# Altium PCB EP3C25.PcbDoc (part 4 of 4)
Units mil, origin at the board's own origin, x right, y up, seen from the top; angles counter-clockwise.
Board outline 6000 x 4000 mil, 2 copper layers (Top Layer, Bottom Layer); 113 components, 182 nets, 855 pads, 215 vias.
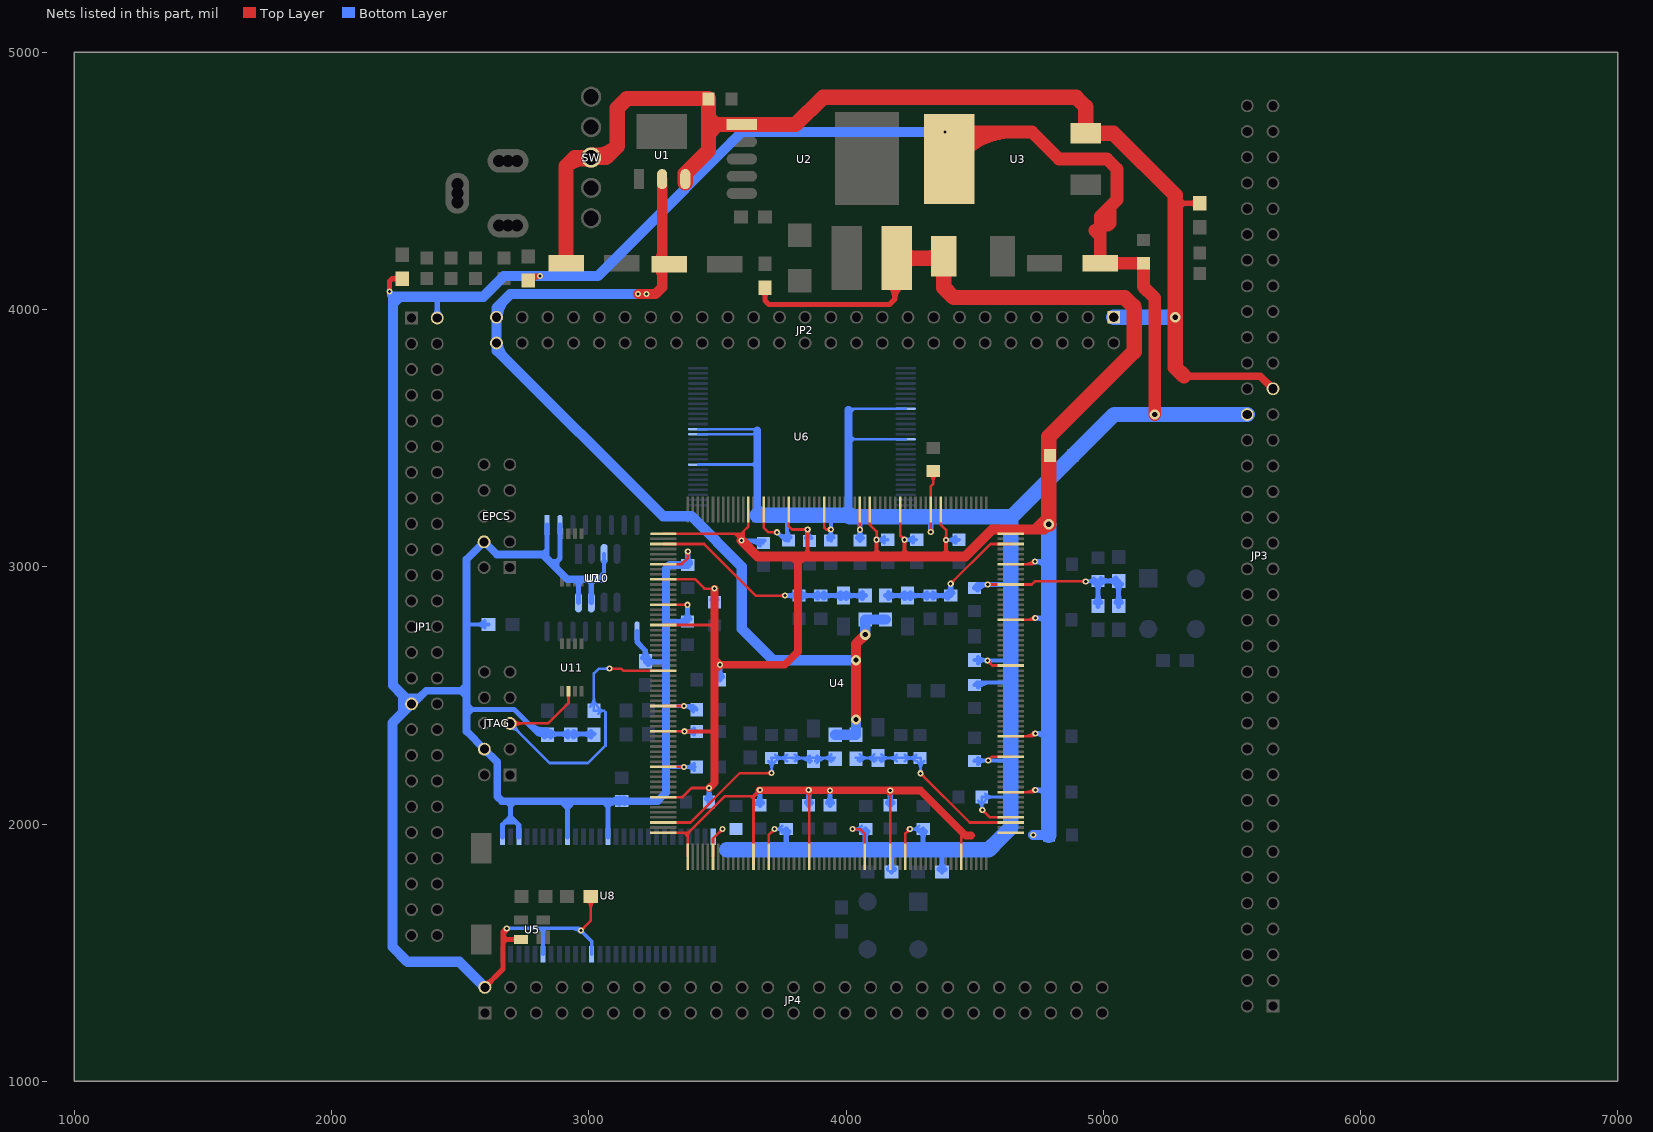
[diagram p4: the nets of this part, all layers, seen from the top]

## Via types
v1: diameter 24, hole 12, Top Layer to Bottom Layer, 205 vias
v2: diameter 40, hole 20, Top Layer to Bottom Layer, 6 vias
v3: diameter 250, hole 130, Top Layer to Bottom Layer, 3 vias
v4: diameter 250, hole 150, Top Layer to Bottom Layer, 1 vias

## Nets (pads, with @x,y where several pads share a name; then routed paths per layer and width w, separated by ;. In a path a pad name is that pad's centre, name@x,y a point inside that pad or via, vN(x,y) a via of type N, cw(c..) or ccw(c..) an arc to the next point about the centre after c; other vN are vias at no path point) (continued)
TMS: JTAG.5 R18.1 U4.28 U11.2 | length 1708.9
  Top Layer w10: JTAG.5@2694,2391 2841,2391 2921.2,2471.2 U11.2@2921.2,2516.49 ; JTAG.5@2708.14,2376.86 cw(c2742.28,2342.72) 2742.28,2391 cw(c2742.28,2439.28) JTAG.5@2708.14,2405.14 ; v1(3080,2604) 3126,2604 3133.49,2596.51 U4.28@3290,2596.51 ; v1@3084.95,2599.05 cw(c3096.9,2587.1) 3096.9,2604 cw(c3096.9,2620.9) v1@3084.95,2608.95
  Bottom Layer w10: JTAG.5@2694,2371 cw(c2694,2322.72) 2728.14,2356.86 cw(c2762.28,2391) JTAG.5@2714,2391 ; JTAG.5@2694,2391 2848,2237 2997,2237 3065,2305 3065,2435 3060,2440 ; R18.1@3005.44,2456.53 ccw(c2970.29,2491.68) 3020,2491.68 ccw(c3069.71,2491.68) R18.1@3034.56,2456.53 ; R18.1@3036.76,2428.04 cw(c3060,2411.45) 3060,2440 ; R18.1@3036.76,2451.96 ccw(c3060,2468.55) 3060,2440 ; v1@3075.05,2599.05 ccw(c3063.1,2587.1) 3063.1,2604 ccw(c3063.1,2620.9) v1@3075.05,2608.95 ; v1(3080,2604) 3039,2604 3020,2585 R18.1@3020,2440 3060,2440
VCC_1.2: C5.1 C7.2 C8.2 C10.2 C12.2 C14.2 C15.2 C17.2 C18.2 C27.2 C28.2 C33.2 C34.2 C37.2 C44.2 C48.2 C50.2 C51.2 C53.2 C55.2 L1.2 R5.1 U4.1 U4.10 U4.19 U4.40 U4.53 U4.60 U4.61 U4.74 U4.85 U4.101 U4.115 U4.121 U4.129 U4.140 U4.163 U4.174 U4.180 U4.190 U4.198 U4.204 U4.220 U4.228 | length 15659.4
  Top Layer w10: U4.60@3290,1966.59 3370,1966.59 ; U4.53@3290,2104.38 3364.38,2104.38 3400,2140 v1(3468,2140) ; U4.40@3290,2360.29 3488,2360.29 ; U4.19@3290,2773.67 3467,2773.67 ; U4.10@3290,2950.84 3414.16,2950.84 3450,2915 v1(3489,2915) ; U4.1@3291,3128 3564,3128 ; v1@3367.05,2355.34 ccw(c3355.1,2343.39) 3355.1,2360.29 ccw(c3355.1,2377.19) v1@3367.05,2365.24 ; v1@3376.95,2355.34 cw(c3388.9,2343.39) 3388.9,2360.29 cw(c3388.9,2377.19) v1@3376.95,2365.24 ; U4.61@3384.49,1872.1 3384.49,1963.49 ; 3384.49,1952 3384.49,1952.1 3370,1966.59 ; 3409.5,1988.5 3387.59,1966.59 3381.39,1966.59 ; v1@3463.05,2135.05 ccw(c3451.1,2123.1) 3451.1,2140 ccw(c3451.1,2156.9) v1@3463.05,2144.95 ; v1@3484.05,2910.05 ccw(c3472.1,2898.1) 3472.1,2915 ccw(c3472.1,2931.9) v1@3484.05,2919.95 ; 3488.17,2773.67 3467,2773.67 ; 3489,2756 3471.33,2773.67 3467,2773.67 ; 3489,2791 3471.67,2773.67 3467,2773.67 ; v1@3587,3102 ccw(c3570.1,3102) 3582.05,3113.95 ccw(c3594,3125.9) v1@3594,3109 ; 3592,3114.07 cw(c3581.93,3114.07) 3589.05,3106.95 ccw(c3558.3,3138) 3602,3138 ; 3592,3123.73 ccw(c3615.73,3123.73) v1@3598.95,3106.95 ; 3592.05,3113.95 cw(c3580.1,3102) v1@3597,3102 ; v1@3596.11,3099.87 ccw(c3582.1,3114) 3602,3114 ; U4.228@3620.71,3222.49 3620.71,3156.71 3602,3138 ; U4.74@3640.39,1872.1 3640.39,2107.39 ; 3640.39,2095 3640.39,2097 3630,2107.39 ; v1@3658,2132 cw(c3641.1,2132) 3653.05,2120.05 cw(c3665,2108.1) v1@3665,2125 ; v1@3664,2131 3640.39,2107.39 ; U4.220@3778.19,3222.49 3778.19,3156.81 3790,3145 v1(3851,3145) ; 3832,2131 3837.93,2131 3856.93,2112 ; v1@3846.05,3140.05 ccw(c3834.1,3128.1) 3834.1,3145 ccw(c3834.1,3161.9) v1@3846.05,3149.95 ; v1@3850.05,2127.05 cw(c3833.45,2110.45) 3856.93,2110.45 ; U4.85@3856.93,1872.1 3856.93,2112 ; 3856.93,2119.76 cw(c3867.24,2119.76) v1@3859.95,2127.05 ; v1@3856.93,2130 3856.93,2112 ; 3876,2131 3875.93,2131 3856.93,2112 ; U4.204@4093.15,3222.49 4093.15,3162.85 4119,3137 v1(4119,3105) ; v1@4114.05,3109.95 ccw(c4102.1,3121.9) 4119,3121.9 ccw(c4135.9,3121.9) v1@4123.95,3109.95 ; 4152,2131 4171.89,2111.11 4171.89,2111 ; v1@4166.94,2125.05 cw(c4154.99,2113.1) 4171.89,2113.1 cw(c4188.79,2113.1) v1@4176.84,2125.05 ; U4.101@4171.89,1872.1 4171.89,2111 ; v1(4171.89,2130) 4171.89,2111 ; 4192,2130 4190.89,2130 4171.89,2111 ; U4.198@4211.26,3222.49 4211.26,3120.74 v1(4227,3105) ; v1@4220,3105 ccw(c4203.1,3105) 4215.05,3116.95 ccw(c4227,3128.9) v1@4227,3112 ; 4363,3040 4364,3040 4389,3065 ; 4368.74,3165.61 U4.190@4368.74,3222.49 4368.74,3163.26 4389,3143 4389,3065 ; v1@4384.05,3099.05 cw(c4372.1,3087.1) 4389,3087.1 cw(c4405.9,3087.1) v1@4393.95,3099.05 ; v1@4384.05,3108.95 ccw(c4372.1,3120.9) 4389,3120.9 ccw(c4405.9,3120.9) v1@4393.95,3108.95 ; 4389,3040 4389,3065 ; U4.115@4447.48,1872.1 4447.48,1966 ; U4.129@4640.39,2124.07 4728.07,2124.07 v1(4736,2132) ; U4.140@4640.39,2340.6 4724.6,2340.6 v1(4736,2352) ; U4.163@4640.39,2793.36 4728.36,2793.36 v1(4736,2801) ; U4.174@4640.39,3009.89 4724.89,3009.89 v1(4735,3020) ; 4691.58,2340.6 ccw(c4691.58,2396.42) v1@4731.05,2356.95 ; 4693.69,3009.89 ccw(c4693.69,3061.31) v1@4730.05,3024.95 ; 4699.95,2124.07 ccw(c4699.95,2168.05) v1@4731.05,2136.95 ; 4700.65,2793.36 ccw(c4700.65,2836.35) v1@4731.05,2805.95 ; 4715.72,2340.6 ccw(c4715.72,2372.28) v1@4738.12,2349.88 ; 4717.83,3009.89 ccw(c4717.83,3037.17) v1@4737.12,3017.88 ; 4724.09,2124.07 ccw(c4724.09,2143.91) v1@4738.12,2129.88 ; 4724.79,2793.36 ccw(c4724.79,2812.21) v1@4738.12,2798.88 ; 3370,1966.59 3381.39,1966.59 ; 3381.39,1966.59 3384.49,1963.49 ; 3384.49,1963.49 3528.39,2107.39 3630,2107.39 ; 3564,3128 3578,3128 ; 3564,3128 3568,3128 v1(3594,3102) ; 3578,3128 3592,3128 ; 3578,3128 3592,3114 v1@3592,3104 ; v1@3592,3104 3592,3128 ; v1@3592,3104 v1(3594,3102) ; 3592,3128 3602,3138 ; v1(3594,3102) 3602,3110 3602,3138 ; 3630,2107.39 3640.39,2107.39
  Top Layer w15: v1(3372,2360.29) 3488.29,2360.29 3489,2361 ; 3640.39,2107.39 v1@3664,2131 ; 3829,3040 3851,3062 ; 3848,3040 3851,3043 3851,3065 ; v1(3851,3145) 3851,3065 ; 3875,3040 3873,3040 3851,3062 ; 4097,3040 4119,3062 4119,3065 ; v1(4119,3105) 4119,3065 ; 4122,3040 4119,3043 4119,3065 ; 4142,3040 4119,3063 4119,3065 ; 4205,3040 4227,3062 4227,3067 ; 4222,3040 4227,3045 4227,3067 ; v1(4227,3105) 4227,3067 ; 4250,3040 4227,3063 4227,3067 ; 4389,3040 4389,3065 ; v1(4389,3104) 4389,3065 ; 4411,3040 4389,3062 4389,3065 ; 3851,3062 3851,3065
  Top Layer w20: 3489,2576 3489,2598 v1(3510,2619) 3489,2640 3489,2656 ; R5.1@3673.98,4072.01 cw(c3647.36,4045.39) 3685,4045.39 cw(c3722.64,4045.39) R5.1@3696.02,4072.01 ; R5.1@3685,4085 3685,4035 3700,4020 4169,4020 4190,4041 L1.2@4190,4130 ; L1.2@4164.39,4098.84 cw(c4111.2,4040.71) 4190,4040.71 cw(c4247.9,4040.71) L1.2@4220.62,4091.77 ; 4190,4074.07 cw(c4230.07,4074.07) L1.2@4211.19,4109.41
  Top Layer w30: v1(3468,2140) 3489,2161 v1(3489,2915) ; 3489,2598 v1(3510,2619) ; 3489,2656 3489,2640 v1(3510,2619) ; v1@3664,2131 4170.89,2131 v1(4171.89,2130) 4290,2130 4465,1955 4486,1955 ; 3790,3040 3813,3017 3813,3008 ; 3813,3040 3813,3008 ; 3837,3040 3813,3016 3813,3008 ; v1(3510,2619) 3762,2619 3813,2670 3813,3008
  Top Layer w40: v1(3594,3102) 3656,3040 4464,3040 4569,3145 4734,3145 ; 4739.72,3145 ccw(c4739.72,3213.28) v2(4788,3165) ; 4771,3145 4734,3145 ; 4788,3206 4788,3199 4734,3145
  Top Layer w60: L1.2@4197.5,4200 C5.1@4360,4200 ; L1.2@4218.05,4179.45 cw(c4267.65,4129.85) 4267.65,4200 cw(c4267.65,4270.15) L1.2@4218.05,4220.55 ; 4316.72,4200 ccw(c4316.72,4270.28) C5.1@4366.41,4220.59 ; C5.1@4380,4207 4380,4085 4418.25,4046.75 5083.25,4046.75 5118,4012 5118,4005.41 5120,4003.41 5120,3836.59 4788,3504.59 v2(4788,3165)
  Bottom Layer w10: C48.2@3650,2075 C48.2@3665,2075
  Bottom Layer w15: v1(3372,2360.29) 3419.71,2360.29 C33.2@3420,2360 ; v1@3380.39,2360.29 cw(c3380.39,2320.39) C33.2@3408.6,2348.6 ; v1@3381.77,2360.29 ccw(c3381.77,2398.23) C33.2@3408.6,2371.4 ; v1(3594,3102) C8.2@3684,3102 ; 3616.38,3102 cw(c3616.38,3032.35) C8.2@3665.63,3081.6 ; 3652.59,3102 cw(c3652.59,3068.56) C8.2@3676.24,3092.21 ; C10.2@3844.63,3111.4 ccw(c3829.26,3126.77) 3851,3126.77 ; C10.2@3851,3100 v1(3851,3145) ccw(c3893.31,3145) C10.2@3866.32,3112.41 ; v1(4119,3105) C12.2@4162,3105 ; C12.2@4148.63,3093.6 ccw(c4121.11,3066.08) 4121.11,3105 ccw(c4121.11,3143.92) C12.2@4148.63,3116.4 ; v1(4227,3105) C14.2@4273,3105 ; C14.2@4261.63,3093.6 ccw(c4234.11,3066.08) 4234.11,3105 ccw(c4234.11,3143.92) C14.2@4261.63,3116.4 ; v1(4389,3104) 4438,3104 C15.2@4439,3105 ; v1@4395.7,3104 ccw(c4395.7,3146.34) C15.2@4425.63,3116.4 ; v1@4400.52,3104 cw(c4400.52,3068.49) C15.2@4425.63,3093.6
  Bottom Layer w20: C37.2@3458.37,2097.6 ccw(c3435.11,2120.85) 3468,2120.85 ccw(c3500.89,2120.85) C37.2@3477.63,2097.6 ; C37.2@3468,2086 v1(3468,2140) ; C18.2@3479.37,2871.63 ccw(c3456.11,2894.89) 3489,2894.89 ccw(c3521.89,2894.89) C18.2@3498.63,2871.63 ; C18.2@3489,2862 v1(3489,2915) ; C28.2@3500.37,2572.6 ccw(c3477.11,2595.85) 3510,2595.85 ccw(c3542.89,2595.85) C28.2@3519.63,2572.6 ; C28.2@3510,2561 v1(3510,2619) ; C48.2@3655.37,2082.8 ccw(c3632.11,2106.06) 3665,2106.06 ccw(c3697.89,2106.06) C48.2@3674.63,2082.8 ; C48.2@3665,2073.17 v1(3665,2132) ; C50.2@3846.34,2082.8 ccw(c3825.42,2103.72) 3855,2103.72 ; C50.2@3855,2073.17 v1(3855,2132) ; 3855,2108.4 ccw(c3891.19,2108.4) C50.2@3865.6,2082.8 ; C51.2@3928.37,2082.8 ccw(c3905.11,2106.06) 3938,2106.06 ccw(c3970.89,2106.06) C51.2@3947.63,2082.8 ; C51.2@3938,2073.17 v1(3938,2130) ; C53.2@4162.37,2082.8 ccw(c4139.11,2106.06) 4172,2106.06 ccw(c4204.89,2106.06) C53.2@4181.63,2082.8 ; v1(4171.89,2130) 4172,2129.89 C53.2@4172,2073.17 ; v1(4735,3020) 4778,3020 C17.2@4788,3010 ; v1@4735.72,3020 cw(c4735.72,2959.69) C17.2@4778.37,3002.34 ; v1(4736,2132) 4778,2132 C44.2@4786,2124 ; v1(4736,2801) 4780,2801 C27.2@4787,2794 ; v1@4738.55,2132 cw(c4738.55,2078.52) C44.2@4776.37,2116.34 ; v1@4741.97,2801 cw(c4741.97,2750.93) C27.2@4777.37,2786.34 ; C34.2@4776.89,2333.84 ccw(c4736,2296.89) v1(4736,2352) 4776,2352 C34.2@4787,2341
  Bottom Layer w40: v1(4728,1957) C55.2@4789,1957
  Bottom Layer w60: C55.2@4788,1956 v2(4788,3165)
VCC_2.5: C4.1 JP2.49 JP2.50 L2.1 L3.1 L5.1 L6.1 U1.2 | length 4219
  Top Layer w40: v1(3192,4060) 3258,4060 3285.16,4087.16 U1.2@3285.16,4507 ; C4.1@3267.2,4167.87 cw(c3223.85,4124.52) 3285.16,4124.52 ; C4.1@3267.2,4184.13 ccw(c3223.85,4227.48) 3285.16,4227.48 ; v2(4039,2406) 4039,2700 v2(4075,2736)
  Bottom Layer w40: 2641,3839 JP2.50@2641,3870 ; JP2.50@2646,3870 ccw(c2720.84,3870) 2667.92,3817.08 ; JP2.49@2646,3970 cw(c2744.98,3970) 2674.99,4039.99 ; v1(3225,4060) 2695,4060 2641,4006 JP2.49@2641,3970 JP2.50@2641,3870 ; L5.1@3958,2347 L6.1@4039,2347 v2(4039,2406) ; v2(4039,2637) 3716.73,2637 3595,2758.73 3595,3000.66 3399.66,3196 3289,3196 2641,3844 JP2.50@2641,3870 ; v2(4075,2736) L2.1@4075,2795 L3.1@4154,2795
VCC_3.3: C2.2 C6.1 C9.2 C11.2 C13.2 C16.2 C19.2 C20.2 C21.2 C22.2 C31.2 C32.2 C35.2 C36.2 C45.2 C46.2 C47.2 C49.2 C52.2 C54.2 EPCS.4 JP1.2 JP1.31 JP3.48 JP4.2 JTAG.4 L4.2 L7.2 R3.1 R4.1 R7.1 R9.1 R10.1 R11.2 R12.2 R13.2 R16.2 R17.2 R18.2 R22.1 U3.2 U4.7 U4.15 U4.35 U4.47 U4.66 U4.77 U4.96 U4.104 U4.124 U4.136 U4.154 U4.170 U4.192 U4.206 U4.213 U4.225 U5.4 U6.9 U6.15 U6.16 U6.37 U6.43 U7.1 U7.2 U7.9 U8.1 U8.3 U8.9 U8.14 U8.27 U8.43 U8.49 U10.3 U10.7 U10.8 | length 31198.5
  Top Layer w10: v1(2969.5,1585.5) 3008,1624 R7.1@3008,1718 ; v1@2969.5,1592.5 ccw(c2969.5,1609.4) 2981.45,1597.45 ccw(c2993.4,1585.5) v1@2976.5,1585.5 ; R7.1@2993.44,1703.44 cw(c2958.29,1668.29) 3008,1668.29 cw(c3057.71,1668.29) R7.1@3022.56,1703.44 ; U4.47@3290,2222.49 v1@3367.49,2222.49 ; U4.35@3290,2458.71 v1(3370,2458.71) ; U4.15@3290,2852.41 3383.85,2852.41 3384,2852.26 v1(3384,2852) ; U4.7@3290,3009.89 3360.89,3009.89 3385,3034 v1(3385,3059) ; 3351.92,2222.49 cw(c3351.92,2203.92) v1@3365.05,2217.05 ; 3354.28,2222.49 ccw(c3354.28,2237.72) v1@3365.05,2226.95 ; v1@3365.05,2453.76 ccw(c3353.1,2441.81) 3353.1,2458.71 ccw(c3353.1,2475.61) v1@3365.05,2463.66 ; 3366.11,2852.41 cw(c3366.11,2834.11) v1@3379.05,2847.05 ; 3368.09,2852.41 ccw(c3368.09,2867.91) v1@3379.05,2856.95 ; v1@3380.05,3054.05 cw(c3368.1,3042.1) 3385,3042.1 cw(c3401.9,3042.1) v1@3389.95,3054.05 ; U4.66@3482.91,1872.1 3482.91,1942.91 v1(3520,1980) ; v1@3513,1980 cw(c3496.1,1980) 3508.05,1968.05 cw(c3520,1956.1) v1@3520,1973 ; U4.225@3679.76,3222.49 3679.76,3152.24 3698,3134 v1(3732,3134) ; U4.77@3699.36,1872.19 3699.36,1934.36 3699.36,1957.36 v1(3722,1980) ; v1@3715,1980 cw(c3698.1,1980) 3710.05,1968.05 cw(c3722,1956.1) v1@3722,1973 ; v1@3727.05,3129.05 ccw(c3715.1,3117.1) 3715.1,3134 ccw(c3715.1,3150.9) v1@3727.05,3138.95 ; U4.213@3915.98,3222.49 3915.98,3152.02 3923,3145 v1(3941,3145) ; v1@3936.05,3140.05 ccw(c3924.1,3128.1) 3924.1,3145 ccw(c3924.1,3161.9) v1@3936.05,3149.95 ; v1(4025,1980) 4055,1980 4073.46,1961.54 U4.96@4073.46,1872.1 4073.46,1936.54 ; v1@4029.95,1975.05 cw(c4041.9,1963.1) 4041.9,1980 cw(c4041.9,1996.9) v1@4029.95,1984.95 ; v1@4049.05,3148.95 ccw(c4037.64,3160.36) 4053.78,3160.36 ; 4053.78,3161.44 ccw(c4071.44,3161.44) v1@4058.95,3148.95 ; U4.206@4053.78,3222.49 4053.78,3144.1 4053.88,3144 v1(4054,3144) ; U4.104@4230.94,1872.1 4230.94,1939.06 4230.94,1962.94 v1(4248,1980) ; v1@4241,1980 cw(c4224.1,1980) 4236.05,1968.05 cw(c4248,1956.1) v1@4248,1973 ; v1@4324.42,3140.58 ccw(c4312.47,3152.53) 4329.37,3152.53 ccw(c4346.27,3152.53) v1@4334.32,3140.58 ; C16.2@4325.83,3358.83 cw(c4294.04,3327.04) 4339,3327.04 cw(c4383.96,3327.04) C16.2@4352.17,3358.83 ; v1(4329.37,3135.63) U4.192@4329.37,3222.49 4329.37,3311.37 4339,3321 C16.2@4339,3372 ; v1@4530,2048 cw(c4530,2031.1) 4541.95,2043.05 cw(c4553.9,2055) v1@4537,2055 ; v1(4530,2055) 4559.36,2025.64 U4.124@4640.39,2025.64 ; v1@4550,2628 cw(c4550,2611.1) 4561.95,2623.05 cw(c4573.9,2635) v1@4557,2635 ; v1(4550,2635) 4568.81,2616.19 U4.154@4640.39,2616.19 ; v1(4551,2931) v1@4555,2927 ; v1@4551,2931.15 U4.170@4640.39,2931.15 4722.15,2931.15 4734,2943 v1(4932,2943) ; v1(4553,2247) 4567.86,2261.86 U4.136@4640.39,2261.86 ; v1@4553,2254 ccw(c4553,2270.9) 4564.95,2258.95 ccw(c4576.9,2247) v1@4560,2247 ; v1@4555.95,2926.05 cw(c4568.26,2913.74) 4568.26,2931.15 ; v1@4555.95,2935.95 ccw(c4567.54,2947.54) 4567.54,2931.15 ; v1@4927.05,2938.05 ccw(c4915.1,2926.1) 4915.1,2943 ccw(c4915.1,2959.9) v1@4927.05,2947.95
  Top Layer w20: v1(2225,4070) 2225,4110 2235,4120 R3.1@2275,4120 ; R3.1@2263.98,4108.98 ccw(c2237.36,4082.36) 2237.36,4120 ccw(c2237.36,4157.64) R3.1@2263.98,4131.02 ; JP4.2@2596,1365 2666.8,1435.8 2666.8,1579.8 v1(2681,1594) ; JP4.2@2596,1380 ccw(c2596,1416.21) 2621.61,1390.61 ccw(c2647.21,1365) JP4.2@2611,1365 ; 2666.8,1539 2679.4,1551.6 2682,1551.6 ; 2666.8,1551 2667.4,1551.6 2682,1551.6 ; 2666.8,1554.89 cw(c2720.11,1554.89) v1@2682.41,1592.59 ; 2666.8,1563 2678.2,1551.6 2682,1551.6 ; 2666.8,1573.92 cw(c2685.35,1573.92) v1@2681.42,1592.05 ; U5.4@2722.38,1546.14 ccw(c2709.2,1532.97) 2709.2,1551.6 ccw(c2709.2,1570.23) U5.4@2722.38,1557.05 ; U5.4@2736.69,1551.6 2682,1551.6 ; R4.1@2763,4107 2786,4130 v1(2810,4130) ccw(c2810,4097.22) R4.1@2779.5,4109.25
  Top Layer w40: JP4.2@2596,1365 JP4.2@2598.38,1365
  Top Layer w50: v1(4385,4690) 4723,4690 4828,4585 5015,4585 5054,4546 5054,4427 5027.5,4400.5 ; U3.2@4401,4586 U3.2@4402,4585 ; U3.2@4418.56,4645.44 cw(c4526.15,4537.85) 4526.15,4690 ; U3.2@4453.92,4610.08 cw(c4646.86,4417.14) 4646.86,4690 ; U3.2@4453.92,4713.92 ccw(c4511.67,4771.67) 4511.67,4690 ; 4967,4307 4988.27,4285.73 ; C6.1@4988.27,4180 4988.27,4285.73 ; C6.1@5000,4180 C2.2@5156,4180 5156,4089 5200,4045 v2(5200,3592) ; 5019,4328 5027.5,4336.5 5027.5,4400.5 ; 4988.27,4285.73 4988.27,4361.27 5027.5,4400.5
  Bottom Layer w10: U10.3@3059.84,3035.16 U10.3@3059.84,3050 ; C19.2@3370,3010 3365,3015 3395,3015 C19.2@3400,3010 ; U6.9@3425,3397.48 3631,3397.48 ; U6.15@3425,3515.59 3640.59,3515.59 ; U6.16@3425,3535.28 3595,3535.28 ; 3619.72,3535.28 3595,3535.28 ; 3652.48,3397.48 3636,3397.48 ; 3655,3379 3636.52,3397.48 ; 3655,3416 3636.48,3397.48 ; 3655,3501 3655,3501.18 3640.59,3515.59 ; 3655,3515.59 3655,3519.28 3639,3535.28 ; v1@3726.95,1975.05 cw(c3738.9,1963.1) 3738.9,1980 cw(c3738.9,1996.9) v1@3726.95,1984.95 ; C49.2@3752.67,1967.03 ccw(c3722,1937.26) v1(3722,1980) ; C49.2@3752.67,1992.97 cw(c3722,2022.74) v1(3722,1980) ; C49.2@3768,1980 v1(3722,1980) ; C11.2@3930,3102.6 C11.2@3930,3110 ; 4010,3469 4020,3479 4020,3484.91 4031,3495.91 ; 4010,3513 4013.91,3513 4031,3495.91 ; 4010,3592 4010,3593.02 4031,3614.02 ; 4010.91,3495.91 4031,3495.91 ; 4014.02,3614.02 4031,3614.02 ; v1(4025,1980) C52.2@4077,1980 ; v1@4029.95,1975.05 cw(c4041.9,1963.1) 4041.9,1980 cw(c4041.9,1996.9) v1@4029.95,1984.95 ; C52.2@4061.86,1966.83 ccw(c4030.07,1935.04) 4030.07,1980 ccw(c4030.07,2024.96) C52.2@4061.86,1993.17 ; U6.43@4232.4,3495.91 4031,3495.91 ; U6.37@4232.4,3614.02 4031,3614.02 ; v1(4248,1980) 4299.43,1980 C54.2@4300,1980.57 ; v1@4251.7,1980 ccw(c4251.7,2026.9) C54.2@4284.86,1993.74 ; v1@4252.95,1975.05 cw(c4264.9,1963.1) 4264.9,1980 cw(c4264.9,1996.9) v1@4252.95,1984.95 ; v1@4254.45,1980 cw(c4254.45,1936.99) C54.2@4284.86,1967.4 ; C47.2@4514.43,2089.86 cw(c4482.64,2058.07) 4527.6,2058.07 cw(c4572.56,2058.07) C47.2@4540.77,2089.86 ; 4527.6,2077.69 ccw(c4552.69,2077.69) v1@4534.95,2059.95 ; v1(4530,2055) 4527.6,2057.4 C47.2@4527.6,2105 4635,2105 ; C47.2@4540.77,2091.83 cw(c4572.56,2060.04) 4572.56,2105 cw(c4572.56,2149.96) C47.2@4540.77,2118.17 ; v1@4936.95,2938.05 cw(c4948.9,2926.1) 4948.9,2943 cw(c4948.9,2959.9) v1@4936.95,2947.95 ; v1@4937.9,2943 cw(c4937.9,2904.87) C21.2@4964.86,2931.83 ; 4954.32,2943 ccw(c4954.32,2966.15) C21.2@4971.6,2950.74 ; C21.2@4964.13,2957.4 cw(c4932,2986.06) v1(4932,2943) 4978,2943 C21.2@4980,2945 ; 3595,3535.28 3639,3535.28 ; 3631,3397.48 3636.48,3397.48 ; 3631,3397.48 3636,3397.48 ; 3636,3397.48 3636.52,3397.48 ; 3639,3535.28 3649.72,3535.28 3655,3530 3640.59,3515.59
  Bottom Layer w15: 2525,2776 R13.2@2610.17,2776 ; R13.2@2595.41,2763.21 ccw(c2564.52,2732.33) 2564.52,2776 ccw(c2564.52,2819.67) R13.2@2595.41,2788.79 ; v1(2681,1594) 2681.5,1594.5 2833.5,1594.5 ; v1@2684.18,1590.82 cw(c2693.07,1581.93) 2693.07,1594.5 ; 2804,1594.5 2811.46,1594.5 2822.48,1583.48 ; U8.49@2822.48,1493.42 2822.48,1583.48 ; 2936.91,1594.5 cw(c2936.91,1552.91) v1@2966.32,1582.32 ; U8.43@3011.46,1493.42 3011.46,1543.54 2960.5,1594.5 2833.5,1594.5 ; 3029,2951.21 3033.05,2951.21 3059.84,2978 ; 3053,2951.21 3059.84,2958.05 3059.84,2978 ; U10.3@3055.4,3020.5 cw(c3044.68,3009.78) 3059.84,3009.78 cw(c3075,3009.78) U10.3@3064.28,3020.5 ; U10.3@3059.84,3050 3059.84,2996 3059.84,2978 ; 3300,2222 v1(3370,2222) C36.2@3411,2222 ; 3300,2459 3300.29,2458.71 v1(3370,2458.71) ; 3395.99,2458.71 cw(c3395.99,2432.1) C32.2@3419.03,2445.41 ; C32.2@3406.04,2437.91 ccw(c3370,2417.1) v1(3370,2458.71) ; C36.2@3408.6,2210.6 ccw(c3381.08,2183.08) 3381.08,2222 ccw(c3381.08,2260.92) C36.2@3408.6,2233.4 ; C32.2@3420,2444 3405.29,2458.71 v1(3370,2458.71) ; v1(3732,3134) 3763,3103 3775.6,3103 C9.2@3776,3102.6 ; v1@3737.32,3128.68 ccw(c3763.76,3155.13) C9.2@3770.94,3118.42 ; C9.2@3762.63,3114 ccw(c3744.84,3131.79) 3770,3131.79 ; C9.2@3770,3102.6 3770,3180 ; 3770,3151.26 ccw(c3822.69,3151.26) C9.2@3785.43,3114 ; C11.2@3929.6,3113.4 ccw(c3902.08,3140.92) 3941,3140.92 ccw(c3979.92,3140.92) C11.2@3952.4,3113.4 ; C11.2@3941,3102 3941,3197 3944,3200 ; C35.2@4500,2245 4502,2247 v1(4553,2247) 4637,2247 4640,2244 ; C31.2@4500,2541 4509,2550 4640,2550 ; R10.1@4500,2637 4548,2637 v1(4550,2635) 4610,2635 ; C31.2@4502.76,2540.21 cw(c4526.41,2516.56) 4526.41,2550 ; R10.1@4512.79,2624.21 cw(c4543.67,2593.33) 4543.67,2637 cw(c4543.67,2680.67) R10.1@4512.79,2649.79 ; C35.2@4513.37,2233.6 cw(c4545.72,2201.25) v1@4545.72,2247 ; C35.2@4513.37,2256.4 ccw(c4536.06,2279.09) 4536.06,2247 ; C31.2@4513.37,2529.6 cw(c4562.62,2480.35) 4562.62,2550 ; 4534.31,2637 cw(c4534.31,2619.31) v1@4546.82,2631.82 ; 2822.48,1583.48 2833.5,1594.5
  Bottom Layer w20: 2239,4041 2225,4055 v1(2225,4070) 2245,4050 2315,4050 ; JP1.2@2400.39,3977.61 ccw(c2374.79,4003.21) 2411,4003.21 ccw(c2447.21,4003.21) JP1.2@2421.61,3977.61 ; JP1.2@2411,3967 2411,4041 ; 2525,2422 2525,2423 2547,2445 ; 2525,2445 2553,2445 ; 2525,2467 2547,2445 ; U8.1@2665,1950.11 2665,1997 2677,2009 ; 2680,2088 2696,2072 2696,2064 ; 2696,2038 2696,2028 ; 2701,2088 2696,2083 2696,2064 ; 2714,2088 2696,2070 2696,2064 ; U8.3@2727.99,1950.11 2727.99,1996.01 ; 2755.4,2399.6 ccw(c2840,2484.2) R16.2@2840,2364.56 ; 2789.54,2365.46 ccw(c2840,2415.92) R16.2@2840,2344.56 ; 2820,3048 2838,3066 2838,3078 ; R16.2@2827.92,2339.12 ccw(c2805,2320.43) 2805,2350 ; R16.2@2828.94,2359.96 cw(c2805,2383.75) 2805,2350 ; U7.1@2838,3162 2838,3078 ; 2844,3024 2838,3030 ; R16.2@2851.02,2337.94 cw(c2880.13,2308.84) 2880.13,2350 ; R16.2@2851.02,2359.99 ccw(c2875.15,2384.12) 2875.15,2350 ; 2862,3006 2877,3021 ; 2877.5,2990.5 2877,2991 2877,3021 ; U7.2@2888,3162 2888,3032 2877,3021 ; 2889,2088 2890.94,2088 2916.97,2061.97 ; 2889.87,2350 cw(c2889.87,2308.84) R17.2@2918.98,2337.94 ; 2894.85,2350 ccw(c2894.85,2384.12) R17.2@2918.98,2359.99 ; U8.9@2916.97,1950.11 2916.97,2061.97 ; R17.2@2941.02,2337.94 cw(c2970.13,2308.84) 2970.13,2350 ; R17.2@2941.02,2359.99 ccw(c2965.15,2384.12) 2965.15,2350 ; 2944,2951.21 2959.84,2935.37 2959.84,2927 ; U10.8@2959.84,2861.34 2959.84,2927 ; 2959.84,2951.21 2959.84,2927 ; 2978,2951.21 2959.84,2933.05 2959.84,2927 ; 2979.87,2350 cw(c2979.87,2308.84) R18.2@3008.98,2337.94 ; 2984.85,2350 ccw(c2984.85,2384.12) R18.2@3008.98,2359.99 ; 2993,2951.21 3009.84,2934.37 3009.84,2932 ; U10.7@3009.84,2861.34 3009.84,2932 ; 3014,2951.21 3009.84,2947.05 3009.84,2932 ; R18.2@3020,2350 2930,2350 2840,2350 2805,2350 ; 3027,2951.21 3009.84,2934.05 3009.84,2932 ; 3053,2090 3074.45,2068.55 3074.45,2063 ; U8.14@3074.45,1950.11 3074.45,2063 ; 3074.45,2089.45 3074.45,2063 ; 3079.48,2074.49 cw(c3101.57,2052.4) C45.2@3118.6,2078.58 ; 3087.94,2082.94 cw(c3121.11,2049.78) C45.2@3126.81,2096.33 ; 3095,2090 3074.45,2069.45 3074.45,2063 ; 3096.94,2091.94 cw(c3115.33,2073.54) C45.2@3129.51,2095.35 ; C45.2@3116.4,2080.37 ccw(c3093.15,2057.11) 3093.15,2090 ccw(c3093.15,2122.89) C45.2@3116.4,2099.63 ; C45.2@3139.6,2080.37 cw(c3162.85,2057.11) 3162.85,2090 cw(c3162.85,2122.89) C45.2@3139.6,2099.63 ; U7.9@3187.84,2719.09 ccw(c3216.64,2719.09) 3196.28,2698.72 ; U7.9@3188,2748.61 3188,2707 3220,2675 3220,2630 3300,2630 ; R12.2@3208.98,2645.99 ccw(c3182.36,2672.61) 3220,2672.61 ccw(c3257.64,2672.61) R12.2@3231.02,2645.99 ; R12.2@3231.02,2620.01 cw(c3255.15,2595.88) 3255.15,2630 ; R12.2@3231.02,2642.06 ccw(c3260.13,2671.16) 3260.13,2630 ; 3269,2090 3115,2090 2945,2090 2916.97,2061.97 ; 3300,2785 3302,2787 C22.2@3384,2787 v1(3384,2852) ; C22.2@3372.4,2777.37 ccw(c3349.15,2754.11) 3349.15,2787 ccw(c3349.15,2819.89) C22.2@3372.4,2796.63 ; C22.2@3374.37,2796.63 ccw(c3351.11,2819.89) 3384,2819.89 ccw(c3416.89,2819.89) C22.2@3393.63,2796.63 ; C19.2@3375.37,3016.63 ccw(c3352.11,3039.89) 3385,3039.89 ccw(c3417.89,3039.89) C19.2@3394.63,3016.63 ; C19.2@3385,3007 v1(3385,3059) ; C49.2@3758.37,1970.37 cw(c3735.11,1947.11) 3768,1947.11 cw(c3800.89,1947.11) C49.2@3777.63,1970.37 ; 3768,1915 C49.2@3768,1980 ; C13.2@4044.37,3111.63 ccw(c4021.11,3134.89) 4054,3134.89 ccw(c4086.89,3134.89) C13.2@4063.63,3111.63 ; C13.2@4054,3102 4054,3190.5 4058,3194.5 ; C52.2@4065.4,1970.37 cw(c4042.22,1947.19) 4075,1947.19 ; 4075,1900 C52.2@4075,1980 ; 4075,1947.04 cw(c4107.99,1947.04) C52.2@4084.66,1970.37 ; L7.2@4165.98,1824.02 ccw(c4139.36,1850.64) 4177,1850.64 ccw(c4214.64,1850.64) L7.2@4188.02,1824.02 ; L7.2@4177,1813 4177,1897 4180,1900 ; C54.2@4290.37,1970.94 cw(c4267.11,1947.68) 4300,1947.68 cw(c4332.89,1947.68) C54.2@4309.63,1970.94 ; 4298,1900 4300,1902 C54.2@4300,1980.57 ; 4329,3194.5 4329.37,3194.13 v1(4329.37,3135.63) ; R22.1@4361.98,1824.02 ccw(c4335.36,1850.64) 4373,1850.64 ccw(c4410.64,1850.64) R22.1@4384.02,1824.02 ; R22.1@4373,1813 4373,1900 ; C20.2@4499,2918 4512,2931 v1(4551,2931) ; C20.2@4512.27,2910.39 cw(c4551,2884.3) v1(4551,2931) ; 4609,2931 v1(4551,2931) ; R11.2@4968.98,2860.99 ccw(c4942.36,2887.61) 4980,2887.61 ccw(c5017.64,2887.61) R11.2@4991.02,2860.99 ; C21.2@4970.37,2935.37 cw(c4947.11,2912.11) 4980,2912.11 cw(c5012.89,2912.11) C21.2@4989.63,2935.37 ; R11.2@4980,2845 C21.2@4980,2945 R9.1@5045,2945 ; C21.2@4991.6,2935.37 cw(c5014.85,2912.11) 5014.85,2945 cw(c5014.85,2977.89) C21.2@4991.6,2954.63 ; L4.2@5048.98,2860.99 ccw(c5022.36,2887.61) 5060,2887.61 ccw(c5097.64,2887.61) L4.2@5071.02,2860.99 ; R9.1@5048.98,2932.01 cw(c5022.36,2905.39) 5060,2905.39 cw(c5097.64,2905.39) R9.1@5071.02,2932.01 ; R9.1@5048.98,2933.98 ccw(c5022.36,2907.36) 5022.36,2945 ccw(c5022.36,2982.64) R9.1@5048.98,2956.02 ; L4.2@5060,2845 R9.1@5060,2945 ; 2547,2445 2553,2445 ; 2553,2445 2710,2445 2805,2350 ; 2677,2009 2696,2009 ; 2677,2009 2696,2028 ; 2696,2009 2715,2009 2727.99,1996.01 ; 2696,2009 2696,2064 ; 2696,2028 2727.99,1996.01 ; 2838,3030 2838,3078 ; 2838,3030 2847,3021 2877,3021
  Bottom Layer w30: 2279,2499 2286,2492 2342,2492 ; JP1.31@2311,2467 2317,2467 2342,2492 ; JP1.31@2311,2477 ccw(c2311,2515.63) 2338.31,2488.31 ; 2525,2489 2525,2497 2504,2518 ; 2525,2539 2504,2518 ; EPCS.4@2599,3097 EPCS.4@2593,3097 ; 3053,2951.21 2916.79,2951.21 2820,3048 2642,3048 EPCS.4@2593,3097 ; 3100.39,2088 ccw(c3100.39,2115.64) C45.2@3119.93,2096.1 ; C45.2@3136.07,2096.1 ccw(c3155.61,2115.64) 3155.61,2088 ; C19.2@3385,3007 3314,3007 3300,2993 3300,2630 3300,2570 3300,2500 3300,2121 3267,2088 2663,2088 2644,2107 2644,2241 JTAG.4@2594,2291 2525,2360 2525,2445 2525,2510 ; 3655,3200 3655,3238 ; 3655,3530 3655,3516 3655,3238 ; 3687,3200 3655,3232 3655,3238 ; 3979,3200 4010,3231 ; 4010,3200 4010,3242 ; 4010,3610 4010,3242 ; 4041,3194.5 4010,3225.5 4010,3231 ; 2342,2492 2368,2518 2493,2518 ; 2493,2518 2517,2518 2525,2510 ; 2493,2518 2504,2518 ; 2525,2510 2525,3029 EPCS.4@2593,3097 ; 4010,3231 4010,3242
  Bottom Layer w40: 2239,4023 2266,4050 2273,4050 ; 2245,4050 2336,4050 ; 2280,2436 2279,2437 2279,2499 ; JP4.2@2596,1365 2496,1465 2295,1465 2237,1523 2237,2393 JP1.31@2311,2467 2279,2499 ; 3135,4230 3156.63,4251.63 ; v1(4385,4690) 3595,4690 3156.63,4251.63 ; 2273,4050 2248,4050 2239,4041 2239,2539 2279,2499 ; 2273,4050 2590,4050 2670,4130 v1(2810,4130) 3035,4130 3156.63,4251.63
  Bottom Layer w60: 3536,1900 4075,1900 4555,1900 4595,1940 4640,1985 4640,2665 4640,2755 4640,2920 4640,3144 ; 3655,3200 4010,3200 ; 4014.5,3194.5 4400,3194.5 4635.5,3194.5 4640,3190 ; 4607,3194.5 4610.71,3194.5 4640,3165.21 4640,3144 ; JP3.48@5560,3592 5042,3592 4640,3190 ; 4640,3144 4640,3190
VCC_5: C1.2 C3.1 JP2.1 JP3.49 R1.2 SW.2 U1.3 U2.1 U3.3 | length 5551.3
  Top Layer w20: 5280,4378 5315,4413 5320,4413 ; 5280,4403 5290,4413 5320,4413 ; 5280,4445 5312,4413 5320,4413 ; R1.2@5363.98,4401.98 ccw(c5337.36,4375.36) 5337.36,4413 ccw(c5337.36,4450.64) R1.2@5363.98,4424.02 ; R1.2@5375,4413 5320,4413
  Top Layer w30: 5313.83,3741.17 5610.83,3741.17 JP3.49@5660,3692
  Top Layer w59.06: C3.1@2911.73,4180 2911.73,4557 2945.73,4591 SW.2@3017.85,4591 ; 2914.1,4559.37 cw(c2978.29,4495.18) SW.2@3006,4581.63 ; SW.2@3010.28,4600.76 ccw(c3025.89,4720.11) 3111,4635 ; SW.2@3013.43,4586.57 SW.2@3009,4591 3067,4591 3111,4635 ; U1.3@3375.32,4493 3375.32,4528.32 3465,4618 3465,4685 3499,4719 ; 3465,4650 C1.2@3465,4819 ; 3465,4744 3490,4719 3499,4719 ; C1.2@3465,4820 3148,4820 3111,4783 3111,4635 ; 3517,4719 U2.1@3595,4719 ; 5313.83,3741.17 5280,3775 5280,4445 5040,4685 U3.3@4932,4685 4932,4788 4895,4825 3910,4825 3804,4719 U2.1@3595,4719 ; 3499,4719 U2.1@3595,4719
  Bottom Layer w60: JP2.1@5041,3970 v2(5280,3970)
VCC_PLL1: C38.2 C39.2 C40.1 L5.2 U4.58 | length 1480.9
  Top Layer w10: U4.58@3290,2005.96 3394.96,2005.96 3587,2198 v1(3711,2198) ; v1@3706.05,2193.05 ccw(c3694.1,2181.1) 3694.1,2198 ccw(c3694.1,2214.9) v1@3706.05,2202.95
  Bottom Layer w10: C38.2@3698.8,2243.4 cw(c3669.35,2213.95) 3711,2213.95 ; v1@3706.05,2202.95 ccw(c3694.1,2214.9) 3711,2214.9 ccw(c3727.9,2214.9) v1@3715.95,2202.95 ; C38.2@3710,2256.57 3711,2255.57 v1(3711,2198) ; v1@3711,2209.27 cw(c3759.26,2209.27) 3725.14,2243.4 cw(c3757.96,2210.57) 3757.96,2257 ; C38.2@3711,2257 3956,2257 L5.2@3954,2255 ; C38.2@3725.14,2269.74 ccw(c3755.89,2300.49) 3755.89,2257 ; 3738.04,2257 cw(c3738.04,2210.57) C39.2@3770.86,2243.4 ; 3740.11,2257 ccw(c3740.11,2300.49) C39.2@3770.86,2269.74 ; C39.2@3791,2256.57 3792.57,2255 C39.2@3811,2255 ; C39.2@3801.14,2243.4 cw(c3833.96,2210.57) 3833.96,2257 ; C39.2@3801.14,2269.74 ccw(c3831.89,2300.49) 3831.89,2257 ; 3812.64,2257 cw(c3812.64,2191.64) C40.1@3858.86,2237.86 ; C40.1@3858.86,2266.14 cw(c3836.79,2288.21) 3836.79,2257 cw(c3836.79,2215.79) C40.1@3865.93,2244.93 ; C40.1@3880.07,2244.93 cw(c3909.21,2215.79) 3909.21,2257 cw(c3909.21,2288.21) C40.1@3887.14,2266.14 ; C40.1@3887.14,2237.86 cw(c3933.36,2191.64) L5.2@3933.36,2257 ; 3905.8,2257 cw(c3905.8,2203.77) L5.2@3943.44,2241.41 ; 3910.78,2257 ccw(c3910.78,2303.19) L5.2@3943.44,2270.53 ; 3929.94,2257 cw(c3929.94,2227.91) L5.2@3950.51,2248.48
VCC_PLL2: C25.2 C26.2 C30.1 L3.2 U4.178 | length 1002.5
  Top Layer w10: v1(4407,2934) 4561.63,3088.63 U4.178@4640.39,3088.63 ; v1@4407,2941 ccw(c4407,2957.9) 4418.95,2945.95 ccw(c4430.9,2934) v1@4414,2934
  Bottom Layer w20: L3.2@4154,2888 C26.2@4407,2888 v1(4407,2934) ; L3.2@4165.02,2876.98 cw(c4191.64,2850.36) 4191.64,2888 cw(c4191.64,2925.64) L3.2@4165.02,2899.02 ; C30.1@4228.39,2877.39 ccw(c4202.79,2851.79) 4202.79,2888 ccw(c4202.79,2924.21) C30.1@4228.39,2898.61 ; C30.1@4249.61,2877.39 cw(c4275.21,2851.79) 4275.21,2888 cw(c4275.21,2924.21) C30.1@4249.61,2898.61 ; C25.2@4315.4,2878.37 ccw(c4292.15,2855.11) 4292.15,2888 ccw(c4292.15,2920.89) C25.2@4315.4,2897.63 ; C25.2@4338.6,2878.37 cw(c4361.85,2855.11) 4361.85,2888 cw(c4361.85,2920.89) C25.2@4338.6,2897.63 ; C26.2@4395.4,2878.37 ccw(c4372.15,2855.11) 4372.15,2888 ccw(c4372.15,2920.89) C26.2@4395.4,2897.63 ; C26.2@4397.37,2897.63 ccw(c4374.11,2920.89) 4407,2920.89 ccw(c4439.89,2920.89) C26.2@4416.63,2897.63
VCC_PLL3: C23.2 C24.2 C29.1 L2.2 U4.3 | length 1274.2
  Top Layer w10: U4.3@3290,3088.63 3448.37,3088.63 3649,2888 v1(3763,2888) ; v1@3758.05,2883.05 ccw(c3746.1,2871.1) 3746.1,2888 ccw(c3746.1,2904.9) v1@3758.05,2892.95
  Bottom Layer w20: v1(3763,2888) L2.2@4075,2888 ; C23.2@3805.4,2878.37 ccw(c3782.15,2855.11) 3782.15,2888 ccw(c3782.15,2920.89) C23.2@3805.4,2897.63 ; C23.2@3828.6,2878.37 cw(c3851.85,2855.11) 3851.85,2888 cw(c3851.85,2920.89) C23.2@3828.6,2897.63 ; C24.2@3890.4,2878.37 ccw(c3867.15,2855.11) 3867.15,2888 ccw(c3867.15,2920.89) C24.2@3890.4,2897.63 ; C24.2@3913.6,2878.37 cw(c3936.85,2855.11) 3936.85,2888 cw(c3936.85,2920.89) C24.2@3913.6,2897.63 ; C29.1@3979.39,2877.39 ccw(c3953.79,2851.79) 3953.79,2888 ccw(c3953.79,2924.21) C29.1@3979.39,2898.61 ; C29.1@4000.61,2877.39 cw(c4026.21,2851.79) 4026.21,2888 cw(c4026.21,2924.21) C29.1@4000.61,2898.61 ; L2.2@4063.98,2876.98 ccw(c4037.36,2850.36) 4037.36,2888 ccw(c4037.36,2925.64) L2.2@4063.98,2899.02
VCC_PLL4: C41.1 C42.2 C43.2 L6.2 U4.123 | length 1361.4
  Top Layer w10: v1@4290,2190 cw(c4290,2173.1) 4301.95,2185.05 cw(c4313.9,2197) v1@4297,2197 ; v1(4290,2197) 4481.04,2005.96 4555.96,2005.96 U4.123@4640.39,2005.96
  Bottom Layer w10: L6.2@4039,2257 C42.2@4279,2257 ; L6.2@4046.49,2248.48 cw(c4067.06,2227.91) 4067.06,2257 ; L6.2@4053.56,2241.41 cw(c4091.2,2203.77) 4091.2,2257 ; L6.2@4053.56,2270.53 ccw(c4086.22,2303.19) 4086.22,2257 ; 4073.3,2257 cw(c4073.3,2205.3) C41.1@4109.86,2241.86 ; 4078.13,2257 ccw(c4078.13,2301.87) C41.1@4109.86,2270.14 ; 4097.44,2257 cw(c4097.44,2229.44) C41.1@4116.93,2248.93 ; C41.1@4131.07,2248.93 cw(c4150.56,2229.44) 4150.56,2257 ; C41.1@4138.14,2241.86 cw(c4174.7,2205.3) 4174.7,2257 ; C41.1@4138.14,2270.14 ccw(c4169.87,2301.87) 4169.87,2257 ; 4165.04,2257 cw(c4165.04,2210.57) C43.2@4197.86,2243.4 ; 4167.11,2257 ccw(c4167.11,2300.49) C43.2@4197.86,2269.74 ; C43.2@4228.14,2243.4 cw(c4260.96,2210.57) 4260.96,2257 ; C43.2@4228.14,2269.74 ccw(c4258.89,2300.49) 4258.89,2257 ; 4240.04,2257 cw(c4240.04,2210.57) C42.2@4272.86,2243.4 ; 4242.11,2257 ccw(c4242.11,2300.49) C42.2@4272.86,2269.74 ; C42.2@4276.8,2243.4 cw(c4244.94,2211.54) 4290,2211.54 ; v1@4285.05,2201.95 ccw(c4273.1,2213.9) 4290,2213.9 ccw(c4306.9,2213.9) v1@4294.95,2201.95 ; C42.2@4288,2256.57 4290,2254.57 v1(4290,2197) ; 4290,2211.69 cw(c4334.85,2211.69) C42.2@4303.14,2243.4
pads on no net: JP1.1 JP1.7 JP1.8 JP1.9 JP1.11 JP1.21 JP1.22 JP1.26 JP1.27 JP1.28 JP1.29 JP1.30 JP1.32 JP1.33 JP1.34 JP1.35 JP2.20 JP2.21 JP3.25 JP4.48 JP4.49 JP4.50 JTAG.6 JTAG.7 JTAG.8 SW. SW.3 U1.4 U2.0 U6.34 U6.36 U6.39 U6.41 U6.45 U6.47 U6.50 U6.52 U6.53 U7.3 U7.4 U7.5 U7.6 U7.11 U7.12 U7.13 U7.14 U8.36 U8.40 U12.2
copper on no net:
  other v3: 5279,1293 2357,4726 5278.75,4726
  other v4: 2357,1293

## Polygon pours and split planes (outlines as drawn)
GND on Top Layer "T Layer-gnd" (hatched 90Degree grid 20 track 10, remove dead copper, pour order 1000): 2154,4906 5757,4906 5799,4864 5799,1158 5727,1086 2197,1086 2106,1177 2106,4858 2154,4906
GND on Bottom Layer "T Layer-gnd" (hatched 90Degree grid 20 track 10, remove dead copper, pour order 1001): 2044,4938 5805,4938 5900,4843 5900,1057 5789,946 1830,946 1543,1233 1543,4437 2044,4938

## Keep-outs
Keep-Out Layer:
  lines w10: 2195.75,1140 2195.75,1183 2195.75,4750.4 2195.75,4876 ; 2195.75,1149 2195.75,1135 5726.75,1135 ; 2196.75,4877 2195.75,4876 ; 2200.75,1135 5483.27,1135 ; 5735.75,1136 5735.75,4700 5735.75,4873.75 ; 5735.75,4875.75 5736,4876 5478.27,4876 2195.75,4876

## Other copper
Top Layer:
  rectangle net VCC_1.2: 4447.48,1940 4742,1972
  rectangle net VCC_1.2: 4569.14,3123 4818,3160
  rectangle net NetD5_2: 3810,4245 4065,4350
  rectangle net VCC_3.3: 4910,4145 5055,4350
Bottom Layer:
  rectangle net VCC_3.3: 3474.9,1869 3600,2004

## Silkscreen, mask and mechanical layers (free items; w line width, h text height)
Top Overlay:
  lines w10: 2271,3320 2358,3320 2411,3267 ; 2272,1917 2361,1917 2411,1867 ; 2272,2016 2362,2016 2411,1967 ; 2272,2220 2358,2220 2411,2167 ; 2272,2318 2273,2319 2359,2319 2411,2267 ; 2273,1717 2361,1717 2411,1667 ; 2273,2114 2364,2114 2411,2067 ; 2273,3419 2359,3419 2411,3367 ; 2273,3614 2364,3614 2411,3567 ; 2274,1818 2360,1818 2411,1767 ; 2275,1615 2363,1615 2411,1567 ; 2689,3739 2689,3913 2741,3965 ; 2791,3738 2791,3915 2841,3965 ; 2891,3738 2891,3915 2941,3965 ; 2991,3738 2991,3915 3041,3965 ; 3094,3739 3094,3918 3141,3965 ; 3190,3739 3190,3914 3241,3965 ; 3291,3738 3291,3915 3341,3965 ; 3394,3736 3394,3918 3441,3965 ; 3492,3740 3493,3917 3541,3965 ; 3589,3740 3589,3913 3641,3965 ; 3651,1403 3651,1310 3696,1265 ; 3694,3747 3694,3918 3741,3965 ; 3747,1403 3747,1314 3796,1265 ; 3800,3749 3800,3924 3841,3965 ; 3897,3750 3897,3921 3941,3965 ; 4091,3749 4091,3915 4141,3965 ; 4189,3749 4189,3913 4241,3965 ; 4293,3749 4293,3917 4341,3965 ; 4397,3748 4397,3921 4441,3965 ; 4491,3749 4491,3915 4541,3965 ; 4591,3748 4591,3915 4641,3965 ; 4693,3747 4693,3917 4741,3965 ; 4799,3744 4799,3923 4841,3965 ; 4900,3744 4900,3924 4941,3965 ; 5385.31,3932.31 5576.31,3932.31 5623.31,3979.31 ; 5386.31,2930.31 5575.31,2930.31 5625.31,2980.31 ; 5387.31,2829.31 5574.31,2829.31 5625.31,2880.31 ; 5387.31,3029.31 5574.31,3029.31 5625.31,3080.31 ; 5387.31,3228.31 5573.31,3228.31 5625.31,3280.31 ; 5387.31,3333.31 5578.31,3333.31 5625.31,3380.31 ; 5388.31,2731.31 5576.31,2731.31 5625.31,2780.31 ; 5388.31,3130.31 5575.31,3130.31 5625.31,3180.31 ; 5389,2534 5578,2534 5628,2584 ; 5389,2636 5580,2636 5628,2684 ; 5389.31,3518.31 5563.31,3518.31 5625.31,3580.31 ; 5389.31,3736.31 5580.31,3736.31 5627.31,3783.31 ; 5389.31,4025.31 5569.31,4025.31 5623.31,4079.31 ; 5391.31,3426.31 5571.31,3426.31 5625.31,3480.31 ; 5392,2234 5578,2234 5628,2284 ; 5393.31,3633.31 5578.31,3633.31 5625.31,3680.31 ; 5393.31,3829.31 5573.31,3829.31 5627.31,3883.31 ; 5394,2136 5580,2136 5628,2184 ; 5394.31,2031.31 5576.31,2031.31 5625.31,2080.31 ; 5395.31,1933.31 5578.31,1933.31 5625.31,1980.31 ; 5396.31,1635.31 5580.31,1635.31 5625.31,1680.31 ; 5396.31,1732.31 5577.31,1732.31 5625.31,1780.31 ; 5396.31,1835.31 5580.31,1835.31 5625.31,1880.31 ; 5397.31,1526.31 5571.31,1526.31 5625.31,1580.31 ; 5400.31,1432.31 5577.31,1432.31 5625.31,1480.31 ; 5499,1336 5580,1336 5628,1384 ; 5499,2334 5578,2334 5628,2384 ; 5500,4535 5579,4535 5628,4584 ; 5500.31,4734.31 5577.31,4734.31 5628.31,4785.31 ; 5501.31,4633.31 5576.31,4633.31 5628.31,4685.31 ; 5521.31,1336.31 5579.31,1336.31 5628.31,1385.31 ; 5573.31,2230.31 5628.31,2285.31 ; 5582.31,1337.31 5625.31,1380.31 ; 5582.31,2637.31 5625.31,2680.31 ; 5584.31,2141.31 5628.31,2185.31 ; 5586.31,2341.31 5625.31,2380.31
  text "223" at 5412,4772 h33
  text "221" at 5414,4718 h33
  text "219" at 5411,4668 h33
  text "218" at 5396.31,4614.31 h33
  text "217" at 5395.31,4566.31 h33
  text "216" at 5398,4523 h33
  text "203" at 5392.31,4468.31 h33
  text "202" at 5720,4460 h33 r90
  text "200" at 5720,4350 h33 r90
  text "201" at 5469,4348 h33 r90
  text "197" at 5475,4242 h33 r90
  text "196" at 5720,4240 h33 r90
  text "195" at 5500,4135 h33 r90
  text "194" at 5720,4135 h33 r90
  text "189" at 5431,4074 h33
  text "VCC_5" at 5025,4035 h33
  text "188" at 5299.31,4006.31 h33
  text "187" at 5399.31,3976.31 h33
  text "181" at 5305,3920 h33
  text "182" at 5395.31,3871.31 h33
  text "5" at 2224,3851 h33
  text "4" at 2483,3848 h33
  text "183" at 5295.31,3820.31 h33
  text "5" at 2755,3782 h33 r90
  text "6" at 2853,3777 h33 r90
  text "184" at 5398.31,3769.31 h33
  text "9" at 2223,3757 h33
  text "2.5V" at 2535,3755 h40
  text "6" at 2483,3754 h33
  text "217" at 3754,3731 h33 r90
  text "187" at 4754,3731 h33 r90
  text "185" at 5294.31,3731.31 h33
  text "195" at 4556,3730 h33 r90
  text "185" at 4859,3730 h33 r90
  text "189" at 4655,3728 h33 r90
  text "181" at 5060,3728 h33 r90
  text "231" at 3359,3727 h33 r90
  text "GND" at 4057,3727 h33 r90
  text "183" at 4951,3727 h33 r90
  text "237" at 3053,3725 h33 r90
  text "203" at 4258,3725 h33 r90
  text "201" at 4359,3725 h33 r90
  text "235" at 3158,3724 h33 r90
  text "219" at 3657,3724 h33 r90
  text "214" at 3854,3724 h33 r90
  text "226" at 3452,3723 h33 r90
  text "239" at 2956,3720 h33 r90
  text "233" at 3252,3720 h33 r90
  text "197" at 4451,3719 h33 r90
  text "223" at 3557,3713 h33 r90
  text "4" at 2705,3702 h33 r90
  text "GND" at 5387.31,3672.31 h33
  text "CLK10" at 3951,3659 h33 r90
  text "196" at 4414,3659 h33 r90
  text "188" at 4606,3659 h33 r90
  text "186" at 4707,3659 h33 r90
  text "194" at 4504,3657 h33 r90
  text "184" at 4817,3654 h33 r90
  text "207" at 4107,3652 h33 r90
  text "202" at 4207,3652 h33 r90
  text "216" at 3707,3651 h33 r90
  text "182" at 4914,3651 h33 r90
  text "221" at 3507,3649 h33 r90
  text "200" at 4308,3648 h33 r90
  text "218" at 3604,3646 h33 r90
  text "240" at 2809,3636 h33 r90
  text "234" at 3111,3636 h33 r90
  text "238" at 2906.62,3634.38 h33 r90
  text "230" at 3306,3634 h33 r90
  text "236" at 3006,3633 h33 r90
  text "232" at 3207,3633 h33 r90
  text "224" at 3406,3633 h33 r90
  text "5V" at 5320.31,3623.31 h33
  text "CLK9" at 3910,3616 h33 r90
  text "CLK11" at 3815,3605 h33 r90
  text "13" at 2201,3599 h33
  text "3.3V" at 5360.31,3568.31 h33
  text "177" at 5294.31,3505.31 h33
  text "176" at 5393.31,3468.31 h33
  text "173" at 5293.31,3417.31 h33
  text "18" at 2201,3402 h33
  text "171" at 5396.31,3366.31 h33
  text "21" at 2206,3354 h33
  text "169" at 5292.31,3328.31 h33
  text "22" at 2199,3303 h33
  text "168" at 5394.31,3267.31 h33
  text "167" at 5290.31,3220.31 h33
  text "166" at 5395.31,3168.31 h33
  text "164" at 5288.31,3119.31 h33
  text "162" at 5395.31,3065.31 h33
  text "161" at 5289.31,3020.31 h33
  text "160" at 5394.31,2967.31 h33
  text "159" at 5290.31,2920.31 h33
  text "148" at 5396.31,2870.31 h33
  text "147" at 5292.31,2817.31 h33
  text "146" at 5396.31,2769.31 h33
  text "145" at 5292.31,2722.31 h33
  text "144" at 5403.31,2667.31 h33
  text "143" at 5294,2621 h33
  text "142" at 5393.31,2566.31 h33
  text "139" at 5294,2522 h33
  text "137" at 5395.31,2464.31 h33
  text "CLK5" at 5358,2374 h33
  text "CLK6" at 5356,2322 h33
  text "37" at 2202,2298 h33
  text "CLK4" at 5365,2265 h33
  text "135" at 5297,2215 h33
  text "39" at 2199,2205 h33
  text "134" at 5393.31,2166.31 h33
  text "38" at 2197,2147 h33
  text "133" at 5298,2121 h33
  text "43" at 2198,2097 h33
  text "132" at 5392.31,2068.31 h33
  text "41" at 2207,2050 h33
  text "131" at 5301.31,2021.31 h33
  text "45" at 2200,1997 h33
  text "128" at 5393.31,1971.31 h33
  text "44" at 2203,1949 h33
  text "127" at 5304.31,1925.31 h33
  text "49" at 2198,1899 h33
  text "126" at 5394.31,1869.31 h33
  text "46" at 2197,1850 h33
  text "103" at 5302.31,1823.31 h33
  text "EP3C25" at 4619,1820 h60
  text "51" at 2211,1797 h33
  text "108" at 5400.11,1769.51 h33
  text "50" at 2200,1746 h33
  text "107" at 5306.31,1723.31 h33
  text "SN:130226" at 4616,1722 h60
  text "55" at 2202,1697 h33
  text "110" at 5398.31,1669.31 h33
  text "52" at 2202,1642 h33
  text "V1.1" at 4615,1632 h60
  text "109" at 5305.31,1625.31 h33
  text "57" at 2201,1592 h33
  text "112" at 5398.31,1568.31 h33
  text "56" at 2198,1548 h33
  text "ROBOT" at 4625,1533 h60
  text "111" at 5306.31,1515.31 h33
  text "120" at 4779,1509 h33 r270
  text "108" at 4282,1506 h33 r270
  text "142" at 4482,1506 h33 r270
  text "106" at 4178,1505 h33 r270
  text "110" at 4384,1505 h33 r270
  text "114" at 4583,1504 h33 r270
  text "118" at 4681,1502 h33 r270
  text "95" at 3978,1497 h33 r270
  text "93" at 3885,1491 h33 r270
  text "64" at 2784,1488 h33 r270
  text "68" at 2882,1488 h33 r270
  text "88" at 3585,1488 h33 r270
  text "72" at 3088,1486 h33 r270
  text "70" at 2983,1485 h33 r270
  text "84" at 3487,1484 h33 r270
  text "99" at 4083,1484 h33 r270
  text "76" at 3188,1483 h33 r270
  text "82" at 3386,1483 h33 r270
  text "80" at 3281,1481 h33 r270
  text "114" at 5393.31,1470.31 h33
  text "CLK12" at 3766,1434 h33 r90
  text "CLK15" at 3717,1433 h33 r90
  text "GND" at 2722,1431 h33 r90
  text "CLK14" at 3673,1430 h33 r90
  text "CLK13" at 3812,1430 h33 r90
  text "113" at 5304.31,1421.31 h33
  text "118" at 5399.31,1369.31 h33
  text "117" at 5404,1323 h33
  text "65" at 2884,1210 h33 r270
  text "94" at 3881,1210 h33 r270
  text "98" at 3982,1210 h33 r270
  text "63" at 2778,1208 h33 r270
  text "78" at 3281,1206 h33 r270
  text "69" at 2983,1205 h33 r270
  text "83" at 3481,1205 h33 r270
  text "87" at 3582,1204 h33 r270
  text "71" at 3083,1203 h33 r270
  text "73" at 3184,1202 h33 r270
  text "81" at 3384,1202 h33 r270
  text "120" at 5468.31,1191.31 h33
  text "119" at 5583.31,1187.31 h33
  text "119" at 4762,1173 h33
  text "117" at 4664,1172 h33
  text "GND" at 4866,1172 h33
  text "111" at 4470,1171 h33
  text "113" at 4564,1171 h33
  text "GND" at 2533,1170 h33
  text "109" at 4366,1170 h33
  text "100" at 4059,1169 h33
  text "103" at 4163,1169 h33
  text "107" at 4265,1168 h33
  text "GND" at 2663,1167 h33

## Dimensions
2195.75,4876 to 5735.75,4700 on Top Overlay
2195.75,4876 to 2200.75,1135 on Top Overlay

## Text inside footprints (layer, text, board x,y; h text height)
C5: Top Overlay "+" at 4303,4259 h30 r180
C29: Bottom Overlay "+" at 4000,2963 h20 r90
C30: Bottom Overlay "+" at 4249,2963 h20 r90
C40: Bottom Overlay "+" at 3863,2177 h20 r270
C41: Bottom Overlay "+" at 4114,2181 h20 r270